# EAGLE board OLD 2 LiFePo4 Charger Single to Chain 2.2 SMD -- Finished (EAGLE 6.2)
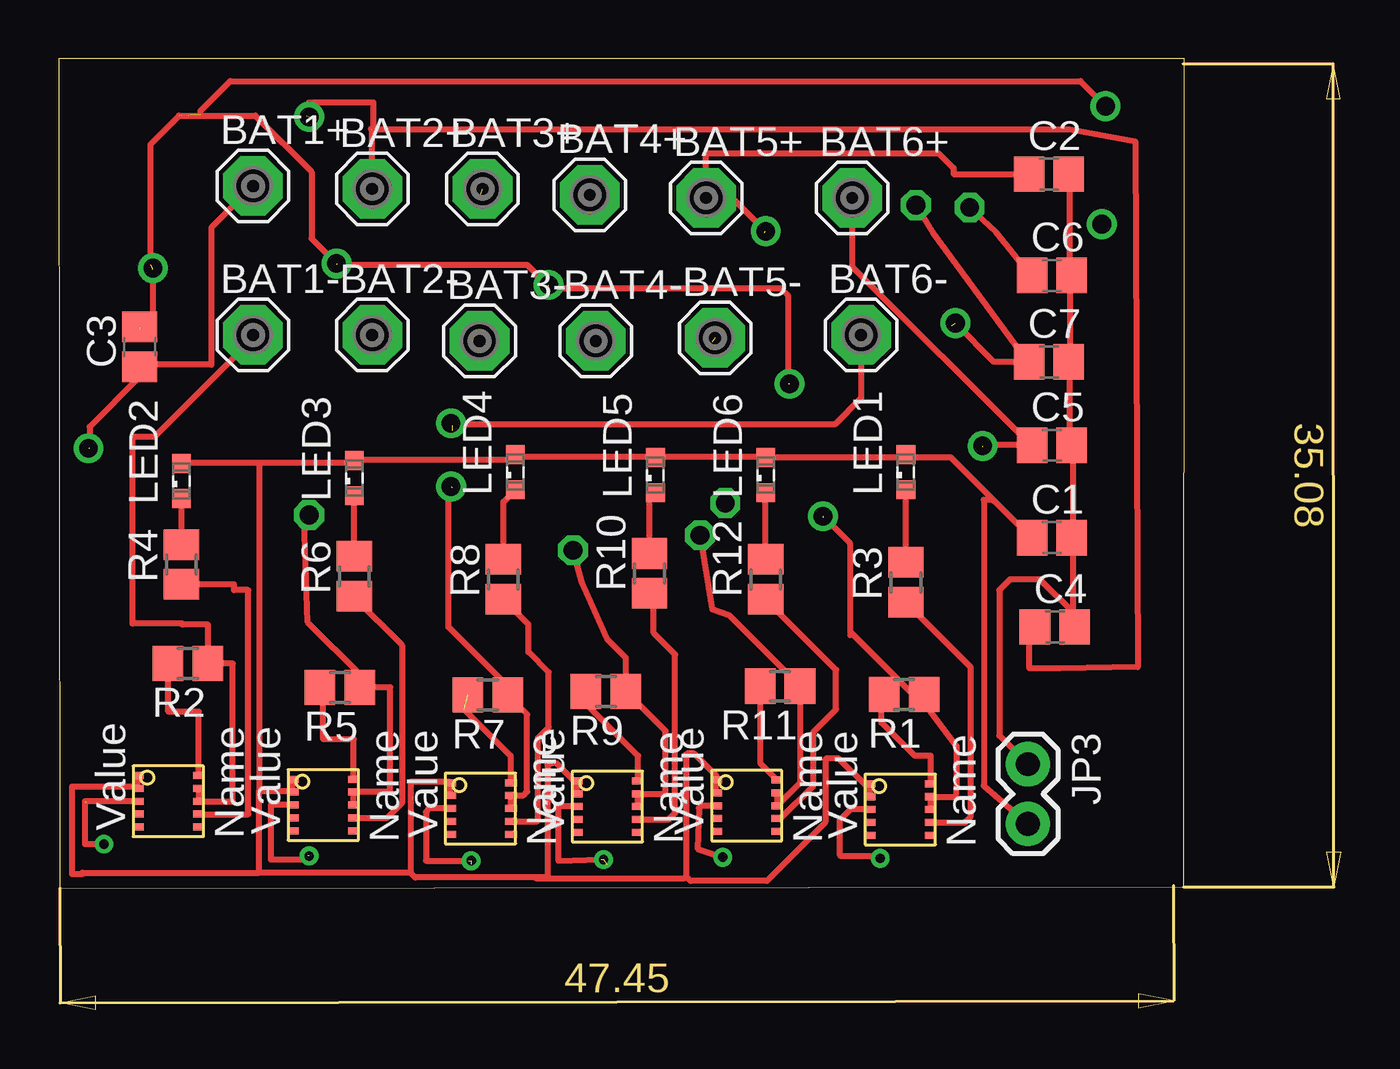
[diagram p0: board, top side]
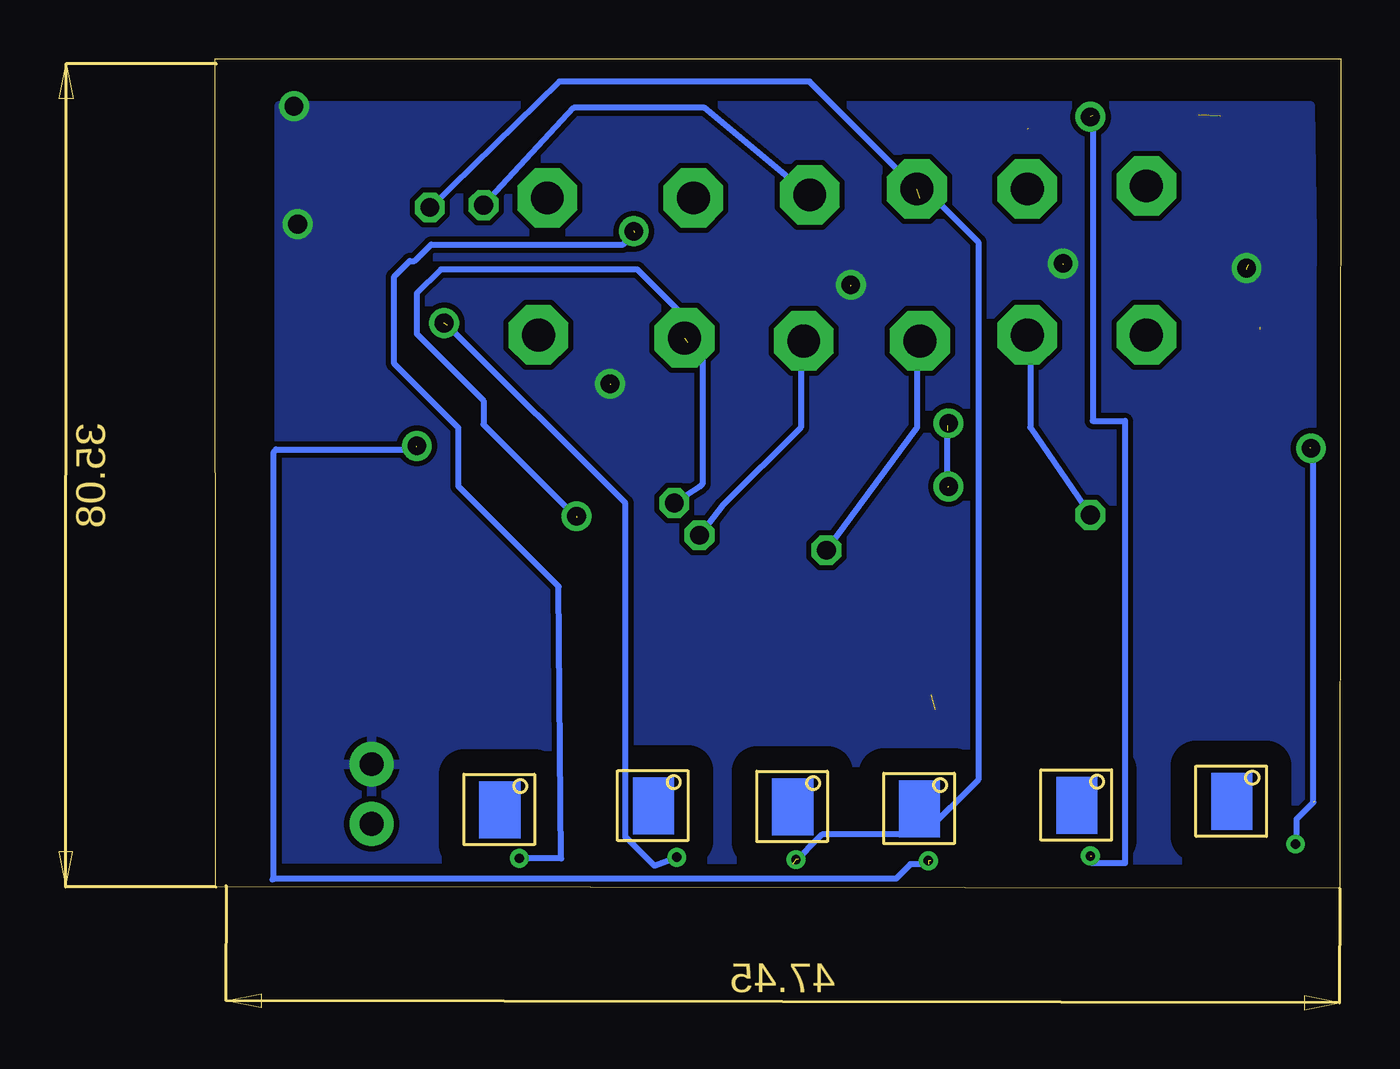
[diagram p1: board, bottom side, seen from below]

Size 47.95 x 35.35 mm. Coordinates in mm from the lower left corner, seen from the top.
Outline: 0.05,0 47.93,0.05 47.95,35.35 0,35.35 0.05,0
Copper layers (1*16): Top 0.035mm / dielectric 1.5mm / Bottom 0.035mm
Design rules: minimum track width 10mil, minimum drill 24mil, track to track 9mil, track to pad 9mil, pad to pad 9mil, via to via 9mil, smd to smd 9mil, copper to edge 40mil, drill to drill 8mil, minimum pad ring 10mil, minimum via ring 8mil, stop-mask expansion 4mil, vias tented up to drill 0mil, thermal gap 10mil
Net classes: 0 default: width 0.025 mm, drill 0.025 mm, clearance 0.025 mm

## Footprints (pad centres in the part's own frame; a part is rotated, then mirrored left to right if it is on the bottom)
SE14 = drill 1.397 pad 2.54 octagon: MP 0,0
C0805 = smd 1.3 x 1.5: 1 -0.85,0; 2 0.85,0
1X02 = drill 1.016 pad 1.88: 1 0,0; 2 2.54,0
SML0603 = smd 0.8 x 0.8: A 0.75,0; C -0.75,0
R0805 = smd 1.3 x 1.5: 1 -0.85,0; 2 0.85,0
MCP73123/223 = smd 0.5 x 0.3: 1 1.47,-1.67; 2 1.47,-2.22; 3 1.47,-2.77; 4 1.47,-3.32; 5 1.47,-3.87; 6 4.07,-3.87; 7 4.07,-3.32; 8 4.07,-2.77; 9 4.07,-2.22; 10 4.07,-1.67

## Placement (x,y rotation side)
BAT1+  SE14  [SE14]  8.28,29.92 0 top
BAT1-  SE14  [SE14]  8.28,23.57 0 top
BAT2+  SE14  [SE14]  13.36,29.79 0 top
BAT2-  SE14  [SE14]  13.36,23.57 0 top
BAT3+  SE14  [SE14]  18.06,29.79 0 top
BAT3-  SE14  [SE14]  17.93,23.32 0 top
BAT4+  SE14  [SE14]  22.63,29.54 0 top
BAT4-  SE14  [SE14]  22.89,23.32 0 top
BAT5+  SE14  [SE14]  27.58,29.41 0 top
BAT5-  SE14  [SE14]  27.96,23.44 0 top
BAT6+  SE14  [SE14]  33.81,29.41 0 top
BAT6-  SE14  [SE14]  34.19,23.57 0 top
C1  4.7  [C0805]  42.32,14.93 0 top
C2  4.7  [C0805]  42.19,30.43 0 top
C3  4.7  [C0805]  3.45,23.06 90 top
C4  4.7  [C0805]  42.44,11.12 0 top
C5  4.7  [C0805]  42.32,18.87 0 top
C6  4.7  [C0805]  42.32,26.11 0 top
C7  4.7  [C0805]  42.19,22.43 0 top
JP3  Vraw/Grnd  [1X02]  41.3,5.28 270 top
LED1  3.2v  [SML0603]  36.09,17.73 90 top
LED2  3.2v  [SML0603]  5.23,17.35 90 top
LED3  3.2v  [SML0603]  12.6,17.47 90 top
LED4  3.2v  [SML0603]  19.46,17.73 90 top
LED5  3.2v  [SML0603]  25.43,17.6 90 top
LED6  3.2v  [SML0603]  30.12,17.6 90 top
R1  1.5k  [R0805]  36.02,8.25 180 top
R2  1.5k  [R0805]  5.51,9.58 180 top
R3  1k  [R0805]  36.09,13.03 90 top
R4  1k  [R0805]  5.23,13.79 90 top
R5  1.5k  [R0805]  11.99,8.56 180 top
R6  1k  [R0805]  12.6,13.28 90 top
R7  1.5k  [R0805]  18.29,8.23 180 top
R8  1k  [R0805]  18.95,13.16 90 top
R9  1.5k  [R0805]  23.32,8.38 180 top
R10  1k  [R0805]  25.17,13.41 90 top
R11  1.5k  [R0805]  30.73,8.61 180 top
R12  1k  [R0805]  30.12,13.16 90 top
U$1  MCP73123/223  [MCP73123/223]  1.9,6.48 0 top
U$2  MCP73123/223  [MCP73123/223]  8.51,6.31 0 top
U$3  MCP73123/223  [MCP73123/223]  15.2,6.17 0 top
U$5  MCP73123/223  [MCP73123/223]  20.61,6.25 0 top
U$6  MCP73123/223  [MCP73123/223]  26.54,6.29 0 top
U$8  MCP73123/223  [MCP73123/223]  33.09,6.12 0 top

## Library data of the parts
BAT1+ BAT1- BAT2+ BAT2- BAT3+ BAT3- BAT4+ BAT4- BAT5+ BAT5- BAT6+ BAT6- = solpad
C1-C7 R1-R12 = resistor
JP3 = SparkFun
LED1-LED6 = led
U$1-U$3 U$5 U$6 U$8 = untitled

## Nets
GND: C1.2 C2.2 C3.2 C4.2 C5.2 C6.2 C7.2 JP3.1
N$1: C1.1 JP3.2 LED1.A LED2.A LED3.A LED4.A LED5.A LED6.A U$1.1 U$1.2 U$2.1 U$2.2 U$3.1 U$3.2 U$5.1 U$5.2 U$6.1 U$6.2 U$8.1 U$8.2
N$3: BAT5+.MP C2.1 U$8.3
N$4: R1.2 U$8.10
N$5: BAT5-.MP R1.1 U$8.8 U$8.9
N$6: LED1.C R3.2
N$7: R3.1 U$8.7
N$8: BAT1+.MP C3.1 U$1.3
N$9: BAT1-.MP R2.1 U$1.8 U$1.9
N$10: R4.1 U$1.7
N$11: R2.2 U$1.10
N$12: BAT2+.MP C4.1 U$2.3
N$13: LED2.C R4.2
N$14: BAT2-.MP R5.1 U$2.8 U$2.9
N$15: R6.1 U$2.7
N$16: R5.2 U$2.10
N$17: LED3.C R6.2
N$19: BAT6-.MP R7.1 U$3.8 U$3.9
N$20: R8.1 U$3.7
N$21: R7.2 U$3.10
N$22: LED4.C R8.2
N$24: BAT3+.MP C6.1 U$5.3
N$25: BAT3-.MP R9.1 U$5.8 U$5.9
N$26: R10.1 U$5.7
N$27: R9.2 U$5.10
N$28: LED5.C R10.2
N$30: BAT4+.MP C7.1 U$6.3
N$31: BAT4-.MP R11.1 U$6.8 U$6.9
N$32: R12.1 U$6.7
N$33: R11.2 U$6.10
N$34: LED6.C R12.2
N$36: BAT6+.MP C5.1 U$3.3

## Tracks (layer width: path | path; a pad name or v marks a point on that pad's centre or on a via)
GND  (via drill 0.8 pad 1.27)  (7 unrouted)
  Top 0.254: 43.2,14.93 43.2,11.76 | C4.2 43.2,11.12 43.2,11.76 | 43.08,22.43 43.08,18.87 C5.2 43.2,18.87 43.2,14.93 | 43.08,26.11 43.08,30.43 C2.2 | 43.08,26.11 43.08,22.43 | 43.08,22.43 C7.2 | 43.08,26.11 C6.2 | 43.2,14.93 C1.2 | 43.2,11.76 41.81,13.16 40.54,13.16 40.08,12.7 40.08,6.5 JP3.1 | 4.01,26.36 4.01,24.38 3.45,23.82 | 3.91,26.57 3.91,31.7 5.13,32.92 8.38,32.92 10.77,30.53 10.77,27.69 v11.84,26.62 | 11.84,26.57 19.96,26.57 20.88,25.65 | 31.09,21.49 31.09,25.25 30.78,25.55 21.13,25.55 20.83,25.86 | 6.04,32.97 6.04,33.12 7.32,34.39 43.53,34.39 v44.6,33.33
  other vias: 4.01,26.42 20.88,25.7 31.14,21.49 44.45,28.3
  pour Bottom: 45.36,0.2 0.79,0.2 1.29,33.35 45.24,33.35 45.24,0.33
N$1
  Top 0.254: U$1.1 U$1.2 3.37,4.32 0.56,4.32 0.56,0.61 1.02,0.61 1.02,0.66 8.53,0.66 | U$2.1 U$2.2 9.98,4.12 8.58,4.12 | U$3.2 U$3.1 16.67,4.52 14.99,4.52 14.99,0.66 | U$5.1 U$5.2 22.08,4.44 21.18,5.33 20.83,5.28 20.83,0.46 20.32,0.46 | U$6.1 U$6.2 28.02,4.8 27.08,5.74 26.77,5.74 26.72,5.69 26.72,0.51 | 8.53,18.11 12.6,18.11 LED3.A 12.6,18.24 19.46,18.24 19.46,18.36 | 8.53,18.11 5.23,18.11 LED2.A | 8.53,18.11 8.53,4.14 8.58,4.12 | 30.12,18.36 25.43,18.36 | 25.43,18.36 19.46,18.36 | 25.43,18.36 LED5.A | 30.12,18.36 36.09,18.36 | 30.12,18.36 LED6.A | 39.8,16.56 38,18.36 36.09,18.36 | C1.1 41.43,14.93 39.86,16.5 39.8,16.56 | 36.09,18.36 LED1.A | JP3.2 39.42,4.37 39.42,16.56 39.8,16.56 | 19.46,18.36 LED4.A | 8.53,0.66 8.53,4.12 8.58,4.12 | 14.99,0.66 8.53,0.66 | 20.32,0.46 15.19,0.46 14.99,0.66 | 26.72,0.51 26.62,0.41 20.37,0.41 20.32,0.46 | U$8.1 U$8.2 34.56,4.2 33.22,5.54 32.71,5.54 32.66,5.49 32.66,2.79 30.18,0.3 26.92,0.3 26.72,0.51
N$2  (via drill 0.8 pad 1.27)
  other vias: 16.71,19.81
N$3  (via drill 0.4, 0.8 pad 1.27)  (1 unrouted)
  Top 0.254: U$8.3 33.73,3.35 33.27,2.9 33.27,1.42 33.32,1.37 34.9,1.37 v35,1.27 | C2.1 38.12,30.43 38.12,30.68 37.49,31.32 27.58,31.32 BAT5+.MP 28.7,29.41 v30.12,27.99
  Bottom 0.254: 30.07,27.94 30.58,27.43 38.76,27.43 39.47,26.72 39.67,26.72 40.33,26.06 40.33,22.35 37.59,19.61 37.59,17.12 33.32,12.85 33.22,1.27 v35,1.27
N$4
  Top 0.254: U$8.10 37.16,5.64 36.47,5.64 35.05,7.06 35.05,8.14 R1.2
N$5  (via drill 0.8 pad 1.27)  (2 unrouted)
  Top 0.254: U$8.8 U$8.9 37.2,3.86 38.2,3.86 38.25,4.37 38.25,6.04 36.87,7.89 R1.1 36.4,8.25 33.73,10.92 | 33.73,10.92 33.73,10.77 | 33.73,10.92 33.73,14.68 v32.56,15.85
  Bottom 0.254: v28.4,16.41 27.33,17.09 27.2,17.22 27.2,23.44 BAT5-.MP | 27.84,23.27 27.84,24.23 29.97,26.36 38.35,26.36 39.37,25.35 39.37,23.62 36.52,20.78 36.52,19.76 32.56,15.8
N$6
  Top 0.254: R3.2 LED1.C
N$7
  Top 0.254: U$8.7 38.61,2.8 38.86,3.05 38.86,9.41 R3.1
N$8  (via drill 0.4, 0.8 pad 1.27)  (2 unrouted)
  Top 0.254: BAT1+.MP 6.5,28.14 6.5,22.3 3.45,22.3 C3.1 3.45,21.79 1.32,19.66 1.32,18.75 1.27,18.69 | U$1.3 1.12,3.71 1.12,1.88 v1.93,1.88
  Bottom 0.254: 1.88,1.83 1.88,2.95 1.17,3.66 1.17,18.64 v1.27,18.75
N$9
  Top 0.254: U$1.9 U$1.8 | U$1.8 | BAT1-.MP 8.28,23.44 4.09,19.25 3.15,19.25 3.15,11.28 5.28,11.28 5.28,11.23 6.36,11.23 R2.1 7.42,9.58 7.42,3.71 U$1.8
N$10
  Top 0.254: U$1.7 8.08,3.15 8.08,12.7 7.47,12.7 7.47,12.94 R4.1
N$11
  Top 0.254: U$1.10 5.97,7.52 4.67,7.52 4.67,9.58 R2.2
N$12  (via drill 0.8 pad 1.27)  (3 unrouted)
  Top 0.254: BAT2+.MP 13.36,32.33 43.08,32.33 45.87,31.83 45.97,9.42 42.67,9.37 41.38,9.37 41.35,9.4 41.35,10.88 C4.1 41.68,11.12 | 9.04,3.56 9.98,3.56 U$2.3 9.05,3.54 9.04,3.56 | 10.67,1.37 10.67,1.22 9.04,1.22 9.04,3.56 | 13.31,32.36 13.41,32.36 13.41,33.48 10.67,33.48 v10.67,32.87
  Bottom 0.254: 10.57,32.92 10.57,19.91 9.19,19.91 9.19,1.07 10.62,1.07 10.62,1.37
N$13
  Top 0.254: R4.2 LED2.C
N$14  (via drill 0.8 pad 1.27)
  Top 0.254: U$2.8 U$2.9 12.58,4.12 14.12,4.12 14.12,8.56 R5.1 12.84,9.11 10.62,11.33 10.46,15.7 v10.67,15.9
  Bottom 0.254: v10.67,15.9 13.23,19.63 13.23,23.57 BAT2-.MP
N$15
  Top 0.254: U$2.7 14,3 14.63,3.63 14.63,10.36 12.6,12.39 R6.1
N$16
  Top 0.254: 12.58,4.62 U$2.10 12.58,6.35 11.28,6.35 11.28,8.56 R5.2
N$17
  Top 0.254: R6.2 LED3.C
N$19  (via drill 0.8 pad 1.27)  (2 unrouted)
  Top 0.254: U$3.8 U$3.9 19.27,3.96 19.81,3.96 19.96,4.12 19.96,7.4 R7.1 19.14,8.6 16.61,11.12 16.61,17.02 v16.71,17.12 | BAT6-.MP 34.19,20.88 33.07,19.76 17.02,19.76 16.76,19.51
  Bottom 0.254: 16.76,17.07 16.76,19.71 16.61,19.86
N$20
  Top 0.254: U$3.7 | U$3.7 20.37,2.84 20.42,2.9 20.42,6.4 20.88,6.86 20.88,9.2 20.02,10.06 20.02,11.24 R8.1
N$21  (1 unrouted)
  Top 0.254: U$3.10 19.27,5.64 19.25,5.64 17.27,7.62
N$22
  Top 0.254: R8.2 18.95,16.46 19.46,16.97 LED4.C
N$24  (via drill 0.4, 0.8 pad 1.27)  (3 unrouted)
  Top 0.254: v38.81,29.01 39.93,27.96 41.43,26.11 C6.1 | U$5.3 21.31,3.48 21.29,3.4 21.29,1.17 23.11,1.22
  Bottom 0.254: v38.81,29.01 33.3,34.37 22.63,34.37 BAT3+.MP | 17.93,29.41 17.32,29.41 15.44,27.53 15.44,4.62 17.78,2.29 22.1,2.29 23.37,1.02
  other vias: 23.22,1.22
N$25  (via drill 0.8 pad 1.27)
  Top 0.254: U$5.8 U$5.9 25.84,4.03 25.86,4.01 25.86,6.69 R9.1 24.17,9.82 23.37,10.62 22.3,13 v21.92,14.4
  Bottom 0.254: v21.92,14.4 18.06,19.63 18.06,23.32 BAT3-.MP
N$26
  Top 0.254: 24.68,2.95 U$5.7 25.99,2.93 26.26,3.2 26.26,9.96 25.35,10.87 25.35,12.38 R10.1
N$27
  Top 0.254: U$5.10 24.68,5.64 | 24.68,5.64 24.69,5.64 | R9.2 22.47,7.85 24.68,5.64
N$28
  Top 0.254: R10.2 25.17,16.59 25.43,16.84 LED5.C
N$30  (via drill 0.4, 0.8 pad 1.27)  (1 unrouted)
  Top 0.254: U$6.3 27.39,3.52 27.28,3.4 27.23,1.68 v28.3,1.32 | 41.3,22.43 37.24,27.96 v36.52,29.11 | 41.3,22.43 C7.1 | 41.3,22.43 39.85,22.43 v38.2,24.08
  Bottom 0.254: v36.52,29.11 32.69,33.25 27.1,33.25 BAT4+.MP | 38.05,23.98 30.48,16.41 30.48,2.18 29.26,0.97 29.21,0.97 v28.3,1.32
N$31  (via drill 0.8 pad 1.27)
  Top 0.254: v27.33,15.04 27.84,11.89 28.56,11.63 R11.1 31.58,4.49 U$6.8 U$6.9
  Bottom 0.254: v27.33,15.04 26.31,16.33 23.01,19.63 23.01,23.32 BAT4-.MP
N$32
  Top 0.254: U$6.7 30.75,2.97 32.16,4.37 32.16,6.66 33.12,7.62 33.12,9.31 R12.1
N$33
  Top 0.254: R11.2 29.88,5.35 U$6.10
N$34
  Top 0.254: R12.2 LED6.C
N$35  (via drill 0.4)
  other vias: 10.67,1.37
N$36  (via drill 0.4, 0.8 pad 1.27)  (3 unrouted)
  Top 0.254: U$3.3 15.79,3.4 15.65,3.25 15.65,1.17 17.48,1.17 | 41.43,18.87 33.81,26.49 BAT6+.MP | 41.43,18.87 C5.1 | 41.43,18.87 39.39,18.87 v39.37,18.85
  Bottom 0.254: 17.58,1.02 18.34,1.02 18.95,0.41 45.47,0.41 | 45.47,0.41 45.52,0.35 | 45.47,0.41 45.47,18.59 45.36,18.69 39.78,18.69 | 39.78,18.69 39.72,18.75 | 39.78,18.69 39.47,18.69 39.37,18.8
  other vias: 17.58,1.17
(copper drawn outside any net)
  shapes: Bottom circle x4, Top circle x4